# Altium PCB KORICHE_N3.PCBDOC
Units mm, origin at the board's own origin, x right, y up, seen from the top; angles counter-clockwise.
Board outline 84.07 x 63.12 mm, 2 copper layers (TopLayer, BottomLayer); 37 components, 35 nets, 148 pads, 21 vias.
Unrouted connection lines stored in the file: 2.
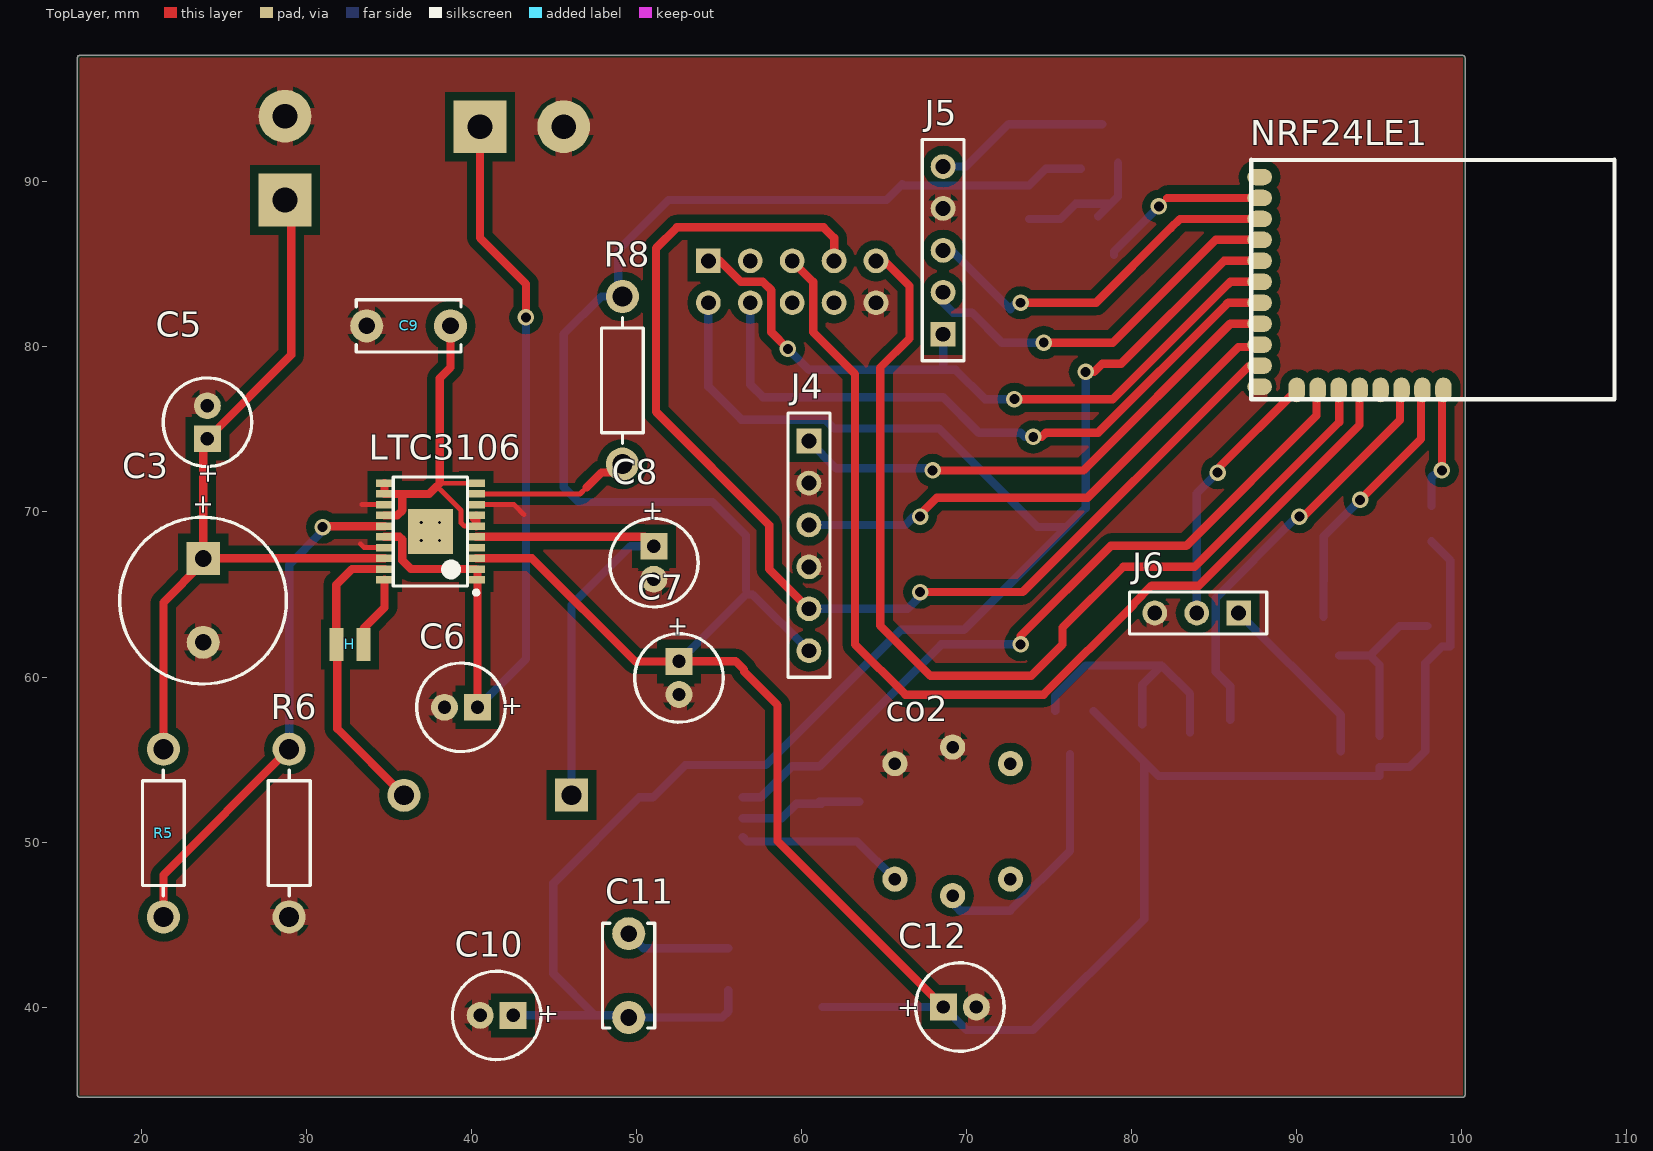
[diagram p0: TopLayer view]
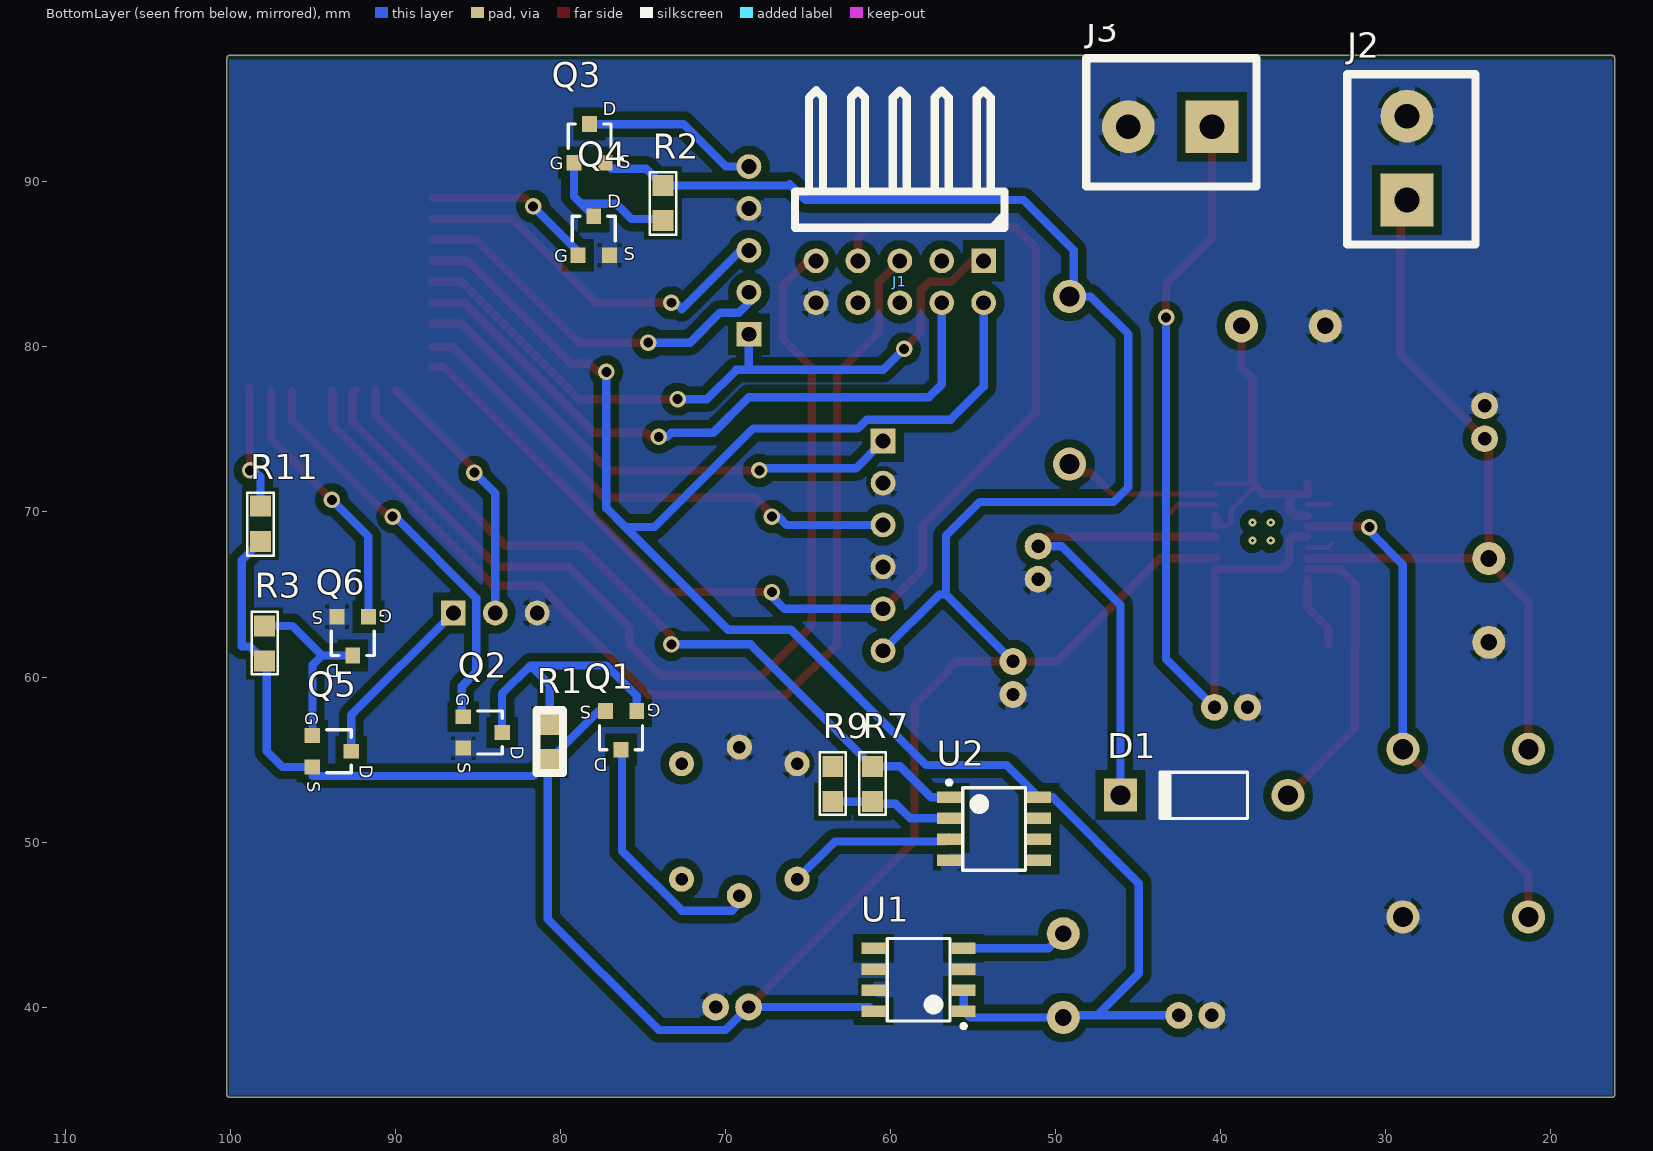
[diagram p1: BottomLayer view, seen from below]
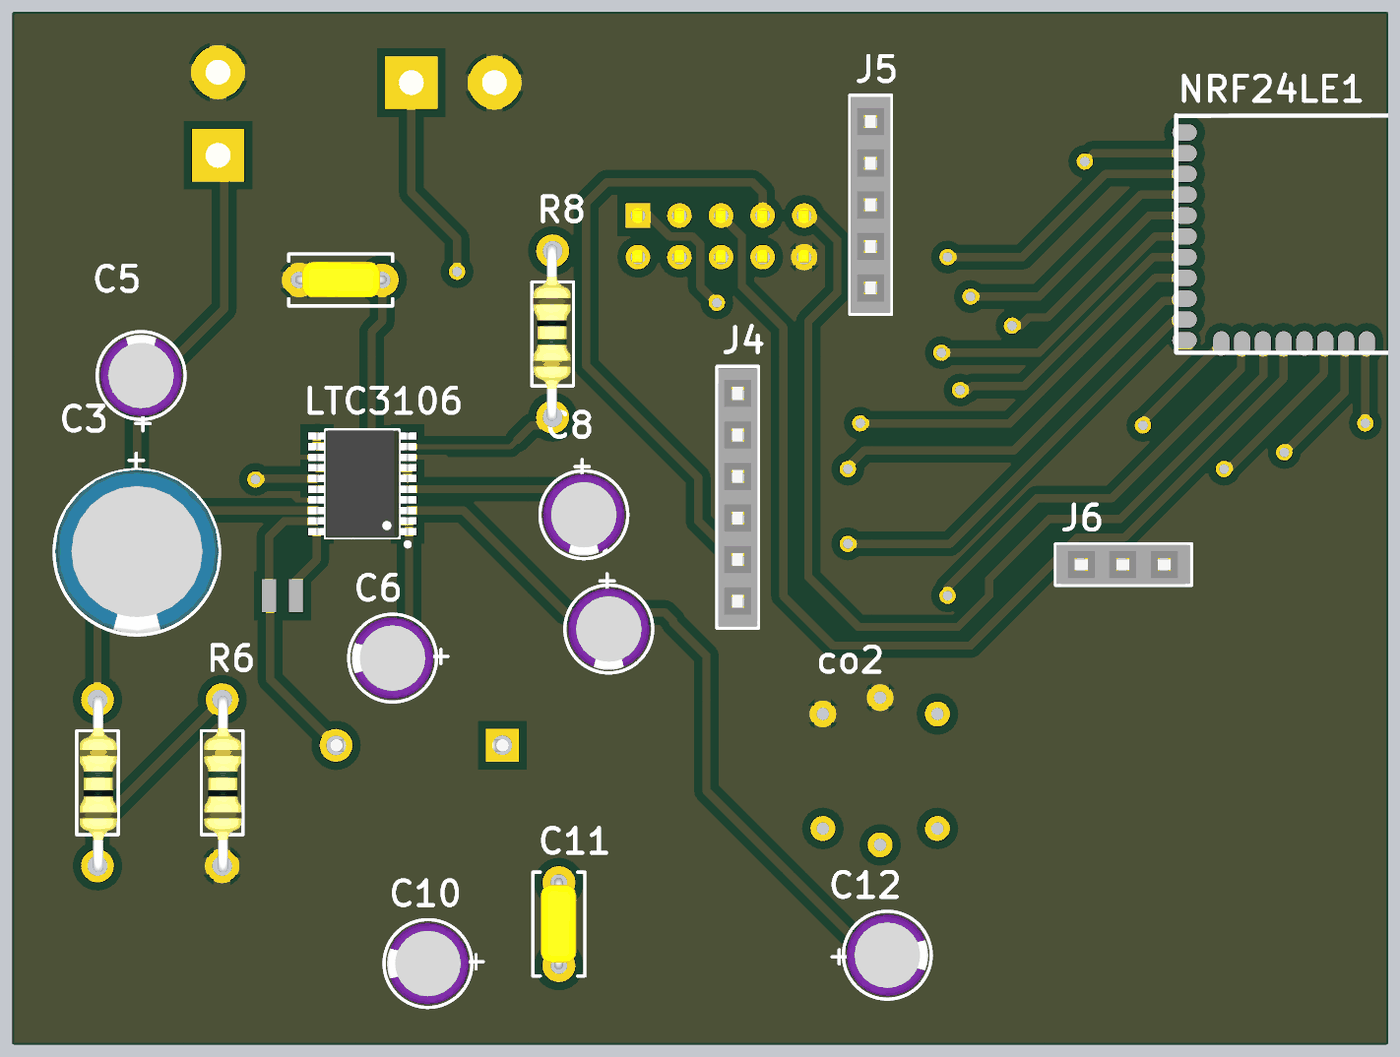
[diagram p2: 3D render of the assembled board from above, using the file's embedded part models]
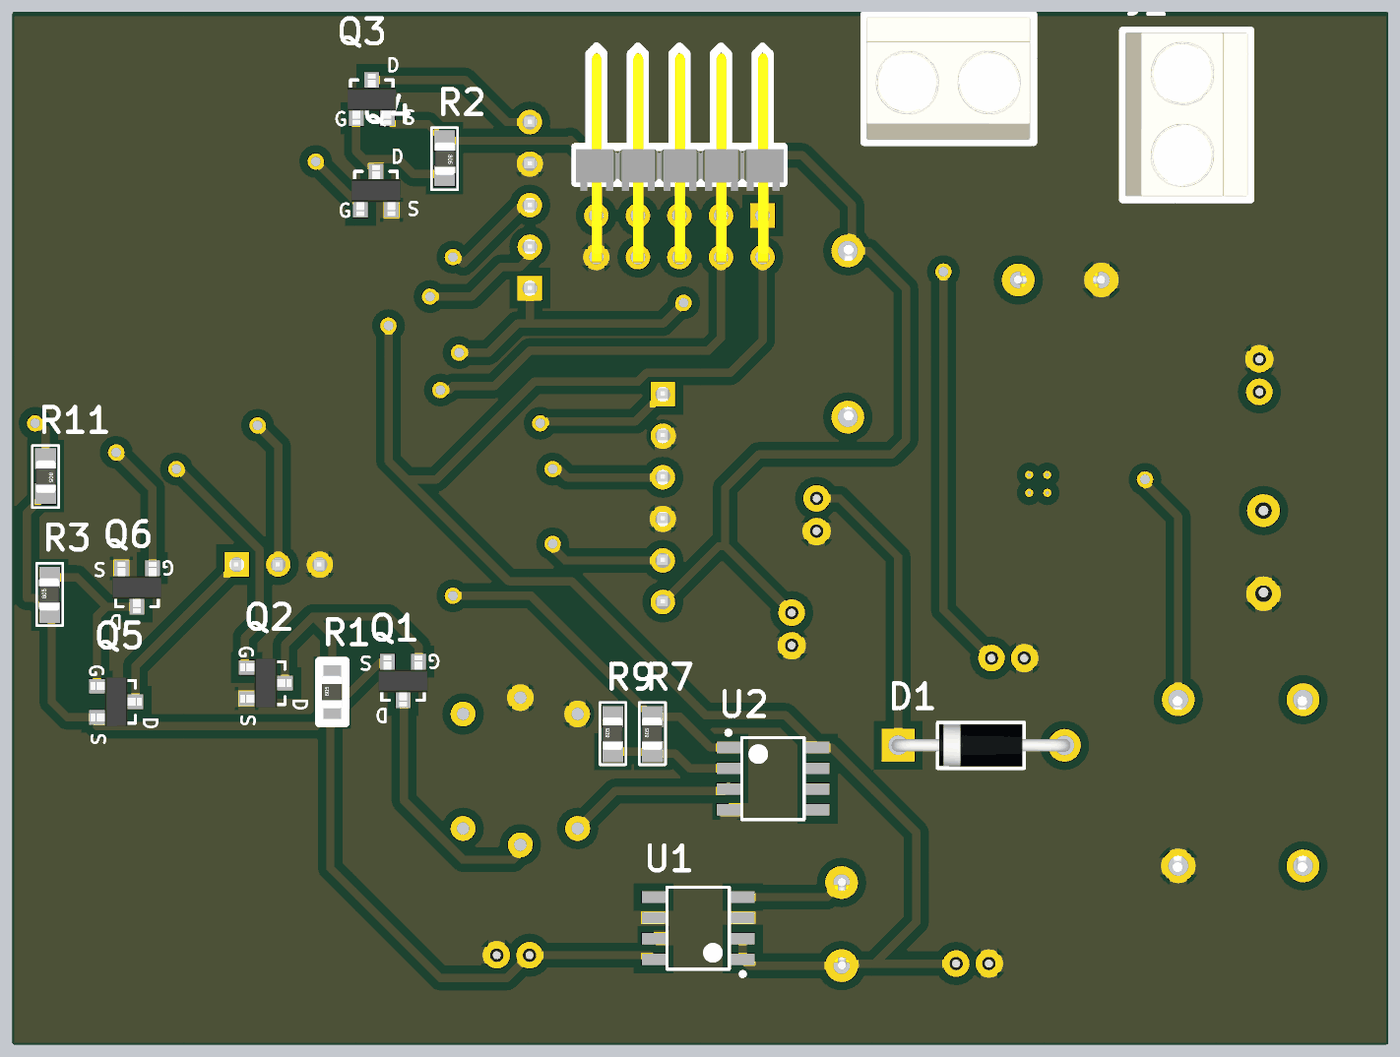
[diagram p3: 3D render of the assembled board from below, using the file's embedded part models]

## Layer stack, top to bottom
TopSolder: solder mask 0.0102, Solder Resist, Dk 3.5
TopLayer: signal copper 0.0356
Dielectric1: core 0.32, FR-4, Dk 4.8
BottomLayer: signal copper 0.0356
BottomSolder: solder mask 0.0102, Solder Resist, Dk 3.5

## Board outline
16.256,34.544 cw(c16.256,34.671) 16.129,34.671 16.129,97.536 cw(c16.256,97.536) 16.256,97.663 100.076,97.663 cw(c100.076,97.536) 100.203,97.536 100.203,34.671 cw(c100.076,34.671) 100.076,34.544

## Design rules (kind name [scope] priority, off if disabled: settings)
Clearance Clearance_17 [InNamedPolygon('GND_L02_P022')] p1: gap=0.5
Clearance Clearance_16 [InNamedPolygon('GND_L01_P020')] p2: gap=0.5
Clearance Clearance_15 [InNamedPolygon('GND_L01_P020')] p3: gap=0.5
Clearance Clearance_14 [InNamedPolygon('GND_L02_P022')] p4: gap=0.5
Clearance Clearance_13 [InNamedPolygon('GND_L02_P022')] p5: gap=0.254
Clearance Clearance_12 [InNamedPolygon('top-No Net')] p6: gap=0.5
Clearance Clearance_11 [InNamedPolygon('BottomLayer-No Net')] p7: gap=0.5
Clearance Clearance_10 [InNamedPolygon('BottomLayer-No Net')] p8: gap=0.5
Clearance Clearance_9 [InNamedPolygon('BottomLayer-No Net')] p9: gap=0.5
Clearance Clearance_8 [InNamedPolygon('BottomLayer-No Net')] p10: gap=0.5
Clearance Clearance_7 [InNamedPolygon('GND_L02_P036')] p11: gap=0.254
Clearance Clearance_6 [InNamedPolygon('NONET_L01_P004')] p12: gap=0.5
Clearance Clearance_5 [InNamedPolygon('NONET_L01_P004')] p13: gap=0.5
Clearance Clearance_4 [InNamedPolygon('NONET_L01_P004')] p14: gap=0.5
Clearance Clearance_3 [InNamedPolygon('NONET_L01_P004')] p15: gap=0.5
Clearance Clearance_2 [InNamedPolygon('NONET_L01_P004')] p16: gap=0.5
Clearance Clearance_1 [InNamedPolygon('NONET_L02_P005') Or  InNamedPolygon('NONET_L01_P004')] p17: gap=0.5
Clearance PowerPlaneClearance [InNamedPolygon('NONET_L02_P005') Or  InNamedPolygon('NONET_L01_P004')] p18 off: gap=1.016
Clearance [All] p19: gap=0.3
FabricationTestPointUsage TestPointUsage [All] p1: valid=0 allowmultiple=FALSE
FabricationTestpoint Testpoint [All] p1: side=3 testpointundercomponent=TRUE minsize=1.016 maxsize=2.54 preferedsize=1.524 minholesize=0.508 maxholesize=1.016 preferedholesize=0.813 testpointgrid=0.025 allowsidetop=TRUE allowsidebottom=TRUE usegrid=TRUE gridtolerance=0
Height [All] p1: minheight=0 maxheight=50.8 prefheight=12.7
HoleSize [All] p1: absolutevalues=TRUE maxlimit=7.62 minlimit=0.025 maxpercent=80.000 minpercent=20.000
PlaneClearance [All] p1: clearance=1.016
PlaneConnect [All] p1: planeconnectstyle=Relief reliefexpansion=0.5 reliefentries=4 reliefconductorwidth=1.016 reliefairgap=0.5
PolygonConnect [All] p1: connectstyle=Relief reliefconductorwidth=1.016 reliefentries=4 polygonreliefangle="90 Angle" airgapwidth=0.254
RoutingVias [All] p1: holewidth=0.6 width=1.524 viastyle="Through Hole" minholewidth=0.6 minwidth=1.524 maxholewidth=0.6 maxwidth=1.524
SilkToSolderMaskClearance SilkscreenOverComponentPads [IsPad] p1: minsilkscreentomaskgap=0.254 clearancetoexposedcopper=TRUE
SolderMaskExpansion [All] p1: expansion=0.05
Width [All] p1: maxlimit=3 minlimit=0.3 preferedwidth=0.5 minimp=50.000000 maximp=50.000000 favimp=50.000000
22 further rules are at their usual default settings.

## Components (designator, comment, footprint, x,y, rotation, side; value= is the part's Value field where it differs from the comment)
C3 "CONDENSATEUR_POL_ELECTROLY_RAD_5.08/10.16" CONDENSATEUR_POLARISE_ELECTROLYTIQUE_RADIAL_5.08/10.16 23.749,67.183 r270 top
C5 "CONDENSATEUR_POL_ELECTROLY_RAD_2.0/5.08" CONDENSATEUR_POLARISE_ELECTROLYTIQUE_RADIAL_2.0/5.08 24.003,75.438 r90 top
C6 "CONDENSATEUR_POL_ELECTROLY_RAD_2.0/5.08" CONDENSATEUR_POLARISE_ELECTROLYTIQUE_RADIAL_2.0/5.08 39.37,58.166 r180 top
C7 "CONDENSATEUR_POL_ELECTROLY_RAD_2.0/5.08" CONDENSATEUR_POLARISE_ELECTROLYTIQUE_RADIAL_2.0/5.08 52.578,59.944 r270 top
C8 "CONDENSATEUR_POL_ELECTROLY_RAD_2.0/5.08" CONDENSATEUR_POLARISE_ELECTROLYTIQUE_RADIAL_2.0/5.08 51.054,66.929 r270 top
C9 "CONDENSATEUR_CER_RAD_5.08" CONDENSATEUR_CERAMIQUE_RADIAL_5.08 38.735,81.28 r180 top
C10 "CONDENSATEUR_POL_ELECTROLY_RAD_2.0/5.08" CONDENSATEUR_POLARISE_ELECTROLYTIQUE_RADIAL_2.0/5.08 41.529,39.497 r180 top
C11 "CONDENSATEUR_CER_RAD_5.08" CONDENSATEUR_CERAMIQUE_RADIAL_5.08 49.53,44.45 r270 top
C12 "CONDENSATEUR_POL_ELECTROLY_RAD_2.0/5.08" CONDENSATEUR_POLARISE_ELECTROLYTIQUE_RADIAL_2.0/5.08 69.596,40.005 r0 top
co2 "-6pins" PCBComponent_1 65.659,47.752 r90 top
D1 "DIODE_SCHOTTKY_DO41 : 1N5817" DIODE_DO41 41.021,52.832 r0 bottom
H "Bobine_22nH" SELF 32.639,61.976 r180 top
J1 "BARRETTE_5 CONTACTS_2 RANGEES_MALE_COUDEE" BARRETTE_5X2_M_C 54.356,85.217 r0 bottom
J2 "BORNIER2 DROIT A VIS" BORNIER2_A_VIS 28.702,88.9 r90 bottom
J3 "BORNIER2 DROIT A VIS" BORNIER2_A_VIS 40.513,93.345 r0 bottom
J4 "BARRETTE_6 CONTACTS_1 RANGEE_FEMELLE_DROITE" BARRETTE_6_F_D 60.452,74.295 r270 top
J5 "BARRETTE_5 CONTACTS_1 RANGEE_FEMELLE_DROITE" BARRETTE_5_F_D 68.58,80.772 r90 top
J6 "BARRETTE 3 CONTACTS 1 RANGEE FEMELLE DROITE" BARRETTE_3_F_D 86.487,63.881 r180 top
LTC3106 "LTC3106_Regulateur" ltc3106 26.416,80.518 r180 top
NRF24LE1 "NRF24LE1_32Pin" "NRF24LE1 SMD" 87.757,77.597 r90 top
Q1 "TRANSISTOR_MOSFET-P_SOT23_GSD" TRANSISTOR_MOSFET-P_SOT23_GSD 76.327,56.769 r0 bottom
Q2 "TRANSISTOR_MOSFET-N_SOT23_GSD" TRANSISTOR_MOSFET-N_SOT23_GSD 84.709,56.642 r270 bottom
Q3 "TRANSISTOR_MOSFET-P_SOT23_GSD" TRANSISTOR_MOSFET-P_SOT23_GSD 78.232,92.329 r180 bottom
Q4 "TRANSISTOR_MOSFET-N_SOT23_GSD" TRANSISTOR_MOSFET-N_SOT23_GSD 77.978,86.741 r180 bottom
Q5 "TRANSISTOR_MOSFET-P_SOT23_GSD" TRANSISTOR_MOSFET-P_SOT23_GSD 93.853,55.499 r270 bottom
Q6 "TRANSISTOR_MOSFET-N_SOT23_GSD" TRANSISTOR_MOSFET-N_SOT23_GSD 92.583,62.484 r0 bottom
R1 "RESISTANCE_CMS_0805" RESISTANCE_CMS_0805 80.645,54.991 r90 bottom
R2 "RESISTANCE_CMS_0805" RESISTANCE_CMS_0805 73.787,89.789 r270 bottom
R3 "RESISTANCE_CMS_0805" RESISTANCE_CMS_0805 97.917,60.96 r90 bottom
R5 "RESISTANCE_AXIALE_1/4W" RESISTANCE_1/4W 21.336,45.466 r90 top
R6 "RESISTANCE_AXIALE_1/4W" RESISTANCE_1/4W 28.956,45.466 r90 top
R7 "RESISTANCE_CMS_0805" RESISTANCE_CMS_0805 61.087,52.451 r90 bottom
R8 "RESISTANCE_AXIALE_1/4W" RESISTANCE_1/4W 49.149,83.058 r270 top
R9 "RESISTANCE_CMS_0805" RESISTANCE_CMS_0805 63.5,52.451 r90 bottom
R11 "RESISTANCE_CMS_0805" RESISTANCE_CMS_0805 98.171,70.358 r270 bottom
U1 "LT1763_S8" LT1763-8N 58.293,41.656 r0 bottom
U2 "LM158_SOIC8" LT1763-8N 53.721,50.8 r180 bottom

## Footprints (in the part's own frame and the unit in brackets; to place one, negate y for a bottom-side part, rotate by r counter-clockwise, add the part's x,y. Pads: shape width x height; smd on the part's side, far side on the other; paste and mask are expansions set on the pad)
BARRETTE_3_F_D [mm] "BARRETTE 3 CONTACTS ; 1 RANGEE ; DROITE ; FEMELLE ; ESPACEMENT BROCHES = 2.54 mm"
  rect 1.5x1.5 hole 0.9: 1(0,0)
  round 1.5 hole 0.9: 2(2.54,0) 3(5.08,0)
  silkscreen extent -1.7,-1.27 6.61,1.27, body extent -1.56,-1.21 6.56,1.2, height 8.5
BARRETTE_5_F_D [mm] "BARRETTE 5 CONTACTS ; 1 RANGEE ; DROITE ; FEMELLE ; ESPACEMENT BROCHES = 2.54 mm"
  rect 1.5x1.5 hole 0.9: 1(0,0)
  round 1.5 hole 0.9: 2(2.54,0) 3(5.08,0) 4(7.62,0) 5(10.16,0)
  silkscreen extent -1.6,-1.27 11.8,1.27, body extent -1.5,-1.2 11.7,1.21, height 8.5
BARRETTE_5X2_M_C [mm] "BARRETTE 5 CONTACTS ; 2 RANGEES ; COUDEE ; MALE ; ESPACEMENT BROCHES = 2.54 mm"
  rect 1.5x1.5 hole 0.9: 1(0,0)
  round 1.5 hole 0.9: 2(0,2.54) 3(2.54,0) 4(2.54,2.54) 5(5.08,0) 6(5.08,2.54) 7(7.62,0) 8(7.62,2.54) 9(10.16,0) 10(10.16,2.54)
  silkscreen extent -1.27,-10.34 11.43,-2, body extent -1.3,-9.9 11.4,2.86, height 5.64
BARRETTE_6_F_D [mm] "BARRETTE 6 CONTACTS ; 1 RANGEE ; DROITE ; FEMELLE ; ESPACEMENT BROCHES = 2.54 mm"
  rect 1.5x1.5 hole 0.9: 1(0,0)
  round 1.5 hole 0.9: 2(2.54,0) 3(5.08,0) 4(7.62,0) 5(10.16,0) 6(12.7,0)
  silkscreen extent -1.7,-1.27 14.3,1.27, body extent -1.57,-1.2 14.17,1.21, height 8.5
BORNIER2_A_VIS [mm] "BORNIER 2 PLOTS A VIS ; VERTICAL ; ESPACEMENT BROCHES = 5.08mm"
  rect 3.2x3.2 hole 1.5: 1(0,0)
  round 3.2 hole 1.5: 2(5.08,0)
  silkscreen extent -2.69,-4.15 7.62,3.63, body extent -2.5,-4 7.5,3.5, height 10
CONDENSATEUR_CERAMIQUE_RADIAL_5.08 [mil] "CONDENSATEUR TRAVERSANT CERAMIQUE RADIAL ; DIMENSIONS : 3.17mm x 5.08mm"
  round 79 hole 40: 1(0,0) 2(200,0)
  silkscreen extent -25,-62 225,63, body extent -11,-43 209,42, height 148
CONDENSATEUR_POLARISE_ELECTROLYTIQUE_RADIAL_2.0/5.08 [mil] "CONDENSATEUR POLARISE ELECTROLYTIQUE RADIAL ; DIAMETRE : 5.08mm ; ESPACEMENT BROCHES : 2mm"
  rect 64x64 / inner round 64 / far side round 64 hole 32: 1(-39.37,0)
  round 64 hole 32: 2(39.37,0)
  silkscreen extent -106,-106 106,105, body extent -98,-98 98,98, height 433
CONDENSATEUR_POLARISE_ELECTROLYTIQUE_RADIAL_5.08/10.16 [mil] "CONDENSATEUR POLARISE ELECTROLYTIQUE RADIAL ; DIAMETRE : 10.16mm ; ESPACEMENT BROCHES : 5.08mm"
  rect 79x79 / inner round 79 / far side round 79 hole 40: 1(0,0)
  round 79 hole 40: 2(200,0)
  silkscreen extent -98,-199 299,198, body extent -98,-197 295,197, height 630
DIODE_DO41 [mm] "DIODE DO41 ; DIMENSIONS : 5.2mm x 2.7mm ; PERCAGE : 0.8mm"
  round 2 hole 1.2: 1(-5.11,0)
  rect 2x2 hole 1.2: 2(5.05,-0.01)
  silkscreen extent -2.65,-1.4 2.75,1.4, body extent -5.47,-1.29 5.45,1.28, height 2.55
LT1763-8N [mm] "SOIC, 8-Leads, Body 4,90x3,91mm, Pitch 1,27mm, IPC Medium Density"
  rect 1.45x0.7 smd: 1(-2.725,1.905) 2(-2.725,0.635) 3(-2.725,-0.635) 4(-2.725,-1.905) 5(2.725,-1.905) 6(2.725,-0.635) 7(2.725,0.635) 8(2.725,1.905)
  silkscreen extent -2.85,-2.5 1.9,2.93, body extent -2,-2.5 2,2.5, height 1.76
ltc3106 [mm] "TSOP, 20-Leads, Body 6,60x4,50mm, Pitch 0,65mm, Thermal Pad 2,74x2,74mm, IPC Medium Density"
  rect 1.05x0.45 smd: 1(-13.875,14.625) 2(-13.875,13.975) 3(-13.875,13.325) 4(-13.875,12.675) 5(-13.875,12.025) 6(-13.875,11.375) 7(-13.875,10.725) 8(-13.875,10.075) 9(-13.875,9.425) 10(-13.875,8.775) 11(-8.325,8.775) 12(-8.325,9.425) 13(-8.325,10.075) 14(-8.325,10.725) 15(-8.325,11.375) 16(-8.325,12.025) 17(-8.325,12.675) 18(-8.325,13.325) 19(-8.325,13.975) 20(-8.325,14.625)
  rect 2.74x2.74 smd: 21(-11.1,11.7)
  silkscreen extent -14,8.4 -8.85,15.52, body extent -14.4,8.4 -7.8,15, height 1.2
"NRF24LE1 SMD" [mm]
  oval 1.5x1 smd: 1(-0.2,-11.14) 2(-0.2,-9.87) 3(-0.2,-8.6) 4(-0.2,-7.33) 5(-0.2,-6.06) 6(-0.2,-4.79) 7(-0.2,-3.52) 8(-0.2,-2.25)
  oval 1x1.5 smd: 9(0,0) 10(1.27,0) 11(2.54,0) 12(3.81,0) 13(5.08,0) 14(6.35,0) 15(7.62,0) 16(8.89,0) 17(10.16,0) 18(11.43,0) 19(12.7,0)
  silkscreen extent -0.76,-21.51 13.75,0.51
PCBComponent_1 [mil]
  round 60 hole 30: 1(-39.37,-137.8) 2(0,0) 3(314.96,-137.8) 4(275.59,0) 5(275.59,-275.59) 6(0,-275.59)
RESISTANCE_1/4W [mil] "RESISTANCE 0.25W; DIAMETRE : 2.54mm ; LONGUEUR : 6.35mm ; PAS : 10.16mm"
  round 79 hole 48: 1(0,0) 2(400,0)
  silkscreen extent 50,-50 350,50, body extent -15,-47 409,44, height 116
RESISTANCE_CMS_0805 [mil] "RESISTANCE CMS 0805 ; DIMENSIONS : 2mm x 1.25mm"
  rect 50x50 smd: 1(0,0) 2(84,0)
  silkscreen extent -31,-31 118,31, body extent 4,-24 83,26, height 31
SELF [mm] "Precision Wire Wound Inductor, 2-Leads, Body 2,50x2,00mm, IPC Medium Density"
  rect 0.85x2 smd: 1(-0.825,0) 2(0.825,0)
  body extent -1.25,-1 1.25,1, height 1.2
TRANSISTOR_MOSFET-N_SOT23_GSD [mm] "SOT23 ; DIMENSIONS : 3.0mm x 2.5 mm"
  rect 0.9x0.95 smd: 1(-0.95,-1.175) 2(0.95,-1.175) 3(0,1.175)
  silkscreen extent -1.3,-0.3 1.3,1.18, body extent -1.5,-1.57 1.5,1.57, height 1.1
TRANSISTOR_MOSFET-P_SOT23_GSD [mm] "SOT23 ; DIMENSIONS : 3.0mm x 2.5 mm"
  rect 0.9x0.95 smd: 1(-0.95,-1.175) 2(0.95,-1.175) 3(0,1.175)
  silkscreen extent -1.3,-0.3 1.3,1.18, body extent -1.5,-1.57 1.5,1.57, height 1.1

## Part data
C3: "CONDENSATEUR POLARISE ELECTROLYTIQUE RADIAL 5.08/10.16"
C5 C6 C7 C8 C10 C12: "CONDENSATEUR POLARISE ELECTROLYTIQUE RADIAL 2.0/5.08"
C9 C11: "CONDENSATEUR TRAVERSANT CERAMIQUE RADIAL 5.08mm"
co2: library part capteur_co2, "capteur_co2"
D1: "DIODE SCHOTTKY DO41 : 1N5817"
J1: "BARRETTE 5 CONTACTS 2 RANGEES MALE COUDEE"
J2 J3: library part "BORNIER2_DROIT_A VIS", "BORNIER 2 PLOTS DROIT A VIS 5.08mm"
J4: "BARRETTE 6 CONTACTS 1 RANGEE FEMELLE DROITE"
J5: "BARRETTE 5 CONTACTS 1 RANGEE FEMELLE DROITE"
J6: library part "BARRETTE_3 CONTACTS_1 RANGEE_FEMELLE_DROITE"
LTC3106: library part "LTC31068FE PACKAGE", "LTC3106_Regulateur_MPC"
Q1 Q3 Q5: "TRANSISTOR MOSFET CANAL P BOITIER SOT23_GSD"
Q2 Q4 Q6: "TRANSISTOR MOSFET CANAL N BOITIER SOT23_GSD"
R1 R2 R3 R7 R9 R11: "RESISTANCE CMS 0805"
R5 R6 R8: "RESISTANCE TRAVERSANTE AXIALE 1/4W"
U1: library part LT1763_S8_LDO_3V3_S8, "LDO 3V3 S8"
U2: library part LM_AOP_SOIC, "AOP_LM158 - SOIC8"

## Via types
v1: diameter 1, hole 0.6, TopLayer to BottomLayer, 17 vias
v2: diameter 0.5, hole 0.2, TopLayer to BottomLayer, 4 vias

## Nets (pads, with @x,y where several pads share a name; then routed paths per layer and width w, separated by ;. In a path a pad name is that pad's centre, name@x,y a point inside that pad or via, vN(x,y) a via of type N, cw(c..) or ccw(c..) an arc to the next point about the centre after c; other vN are vias at no path point)
1: C6.1 J3.1 LTC3106.1 LTC3106.2 LTC3106.16 | length 53
  TopLayer w0.5: LTC3106.16 35.647,68.493 35.814,68.326 35.814,67.056 36.327,66.543 LTC3106.2 LTC3106.2@40.291,66.464 ; C6.1 LTC3106.2@40.37,66.464 ; J3.1 40.513,86.614 43.307,83.82 v1(43.307,81.788)
  BottomLayer w0.5: C6.1 43.307,61.103 v1(43.307,81.788)
3V3: C10.1 C11.2 J1.2 NRF24LE1.15 U1.1 U1.2 U2.8 | length 117.1
  TopLayer w0.508: v1(77.216,78.486) 77.724,78.486 78.232,78.994 79.375,78.994 85.598,85.217 NRF24LE1.15
  BottomLayer w0.508: C10.1 47.498,39.497 ; C11.2@49.403,39.37 C11.2 55.187,39.37 U1.1 U1.2 ; C11.2@49.403,39.497 47.498,39.497 ; J1.2 54.356,77.597 56.354,75.599 61.431,75.599 61.973,75.057 68.326,75.057 74.295,69.088 76.073,69.088 ; v1(77.216,78.486) 77.216,70.231 76.073,69.088 ; 47.498,39.497 44.958,42.037 44.958,47.498 50.165,52.705 U2.8 52.959,54.668 57.843,54.668 66.04,62.865 69.85,62.865 76.073,69.088
CMD_CO2: NRF24LE1.3 Q2.1 | length 24.7
  TopLayer w0.508: v1(90.17,69.723) 90.424,69.723 96.266,75.565 NRF24LE1.3@96.266,77.306
  BottomLayer w0.508: Q2.1@85.979,57.404 85.979,59.436 85.09,60.325 85.09,64.77 v1@89.852,69.532
CMD_MICS2684: NRF24LE1.2 Q6.1 | length 16.1
  TopLayer w0.508: v1(93.853,70.739) 97.536,74.422 NRF24LE1.2@97.536,77.306
  BottomLayer w0.5: Q6.1 91.633,65.818
  BottomLayer w0.508: 91.633,65.818 91.633,68.519 v1(93.853,70.739)
CMD_MICS6484: NRF24LE1.18 Q4.1 | length 10.4
  TopLayer w0.3: v1(81.661,88.519) 82.169,89.027
  TopLayer w0.5: 82.169,89.027 NRF24LE1.18
  BottomLayer w0.5: Q4.1 78.928,85.786 v1(81.661,88.519)
CO: J1.1 J5.1 NRF24LE1.14 | length 43.3
  TopLayer w0.508: J1.1 55.052,85.217 56.322,83.947 57.658,83.947 58.166,83.439 58.166,80.899 v1(59.182,79.883) ; v1(72.898,76.835) 78.867,76.835 85.629,83.597 85.979,83.947 NRF24LE1.14
  BottomLayer w0.508: v1(59.182,79.883) 60.452,78.613 69.342,78.613 71.12,76.835 v1(72.898,76.835) ; 68.58,78.74 J5.1
CO2: co2.2 U2.3 | length 10.3
  BottomLayer w0.508: U2.3@56.446,50.292 56.7,50.038 63.373,50.038 co2.2
CO2_O: NRF24LE1.7 R7.2 U2.1 | length 46.2
  TopLayer w0.508: v1(73.279,61.976) 73.279,62.484 78.74,67.945 83.312,67.945 91.207,75.84 NRF24LE1.7@91.207,77.397
  BottomLayer w0.508: U2.1 57.531,52.705 59.411,54.585 R7.2 68.478,61.976 v1(73.279,61.976)
CO2_VCC: co2.1 Q1.3 | length 15.3
  BottomLayer w0.508: co2.1@68.691,46.752 69.596,45.847 72.644,45.847 76.266,49.469 Q1.3@76.266,55.34
FCSN: J1.5 NRF24LE1.5 | length 65.6
  TopLayer w0.5: J1.5 60.706,83.947 60.706,80.899 63.246,78.359 63.246,61.976 66.294,58.928 74.676,58.928 80.107,64.359 80.107,64.419 81.22,65.532 84.074,65.532 93.817,75.275 NRF24LE1.5
FMISO: J1.9 NRF24LE1.6 | length 62
  TopLayer w0.5: J1.9 65.024,85.217 66.548,83.693 66.548,80.518 64.77,78.74 64.77,63.119 67.818,60.071 73.914,60.071 75.819,61.976 75.819,62.998 79.496,66.675 83.82,66.675 92.583,75.438 92.583,77.221 NRF24LE1.6@92.407,77.397
GND: C3.2 C5.2 C6.2 C7.2 C8.2 C9.2 C10.2 C12.2 co2.3 co2.4 J1.10 J2.2 J3.2 J4.2 J4.4 J5.4 J6.3 LTC3106.8 LTC3106.13 LTC3106.17 NRF24LE1.9 Q2.2 Q4.2 Q6.2 R6.1 R9.2 U1.3 U1.6 U1.7 U2.4 | length 6.1
  TopLayer w0.3: 33.274,68.072 33.503,67.843 LTC3106.17 ; 33.359,70.443 LTC3106.13 ; LTC3106.8 42.587,70.443 43.18,69.85
LED: J4.3 NRF24LE1.11 | length 31.8
  TopLayer w0.508: v1(67.183,69.723) 67.183,69.85 68.199,70.866 77.343,70.866 86.474,79.997 NRF24LE1.11@87.757,79.997
  BottomLayer w0.508: J4.3 66.294,69.215 66.802,69.723 v1(67.183,69.723)
MICS2684: J6.1 Q5.3 | length 10.9
  BottomLayer w0.508: J6.1 92.678,57.69 Q5.3
MICS6484: J5.5 Q3.3 | length 10.8
  BottomLayer w0.508: J5.5@68.453,90.932 J5.5 69.977,90.932 72.549,93.504 Q3.3
NetC8_1: C8.1 D1.2 LTC3106.5 | length 29
  TopLayer w0.5: LTC3106.5 50.49,68.493 C8.1
  BottomLayer w0.5: D1.2 46.071,64.359 49.641,67.929 C8.1
NetC11_1: C11.1 U1.4 | length 6.4
  BottomLayer w0.508: C11.1 50.419,43.561 U1.4
NetH_1: H.1 LTC3106.20 | length 4.4
  TopLayer w0.5: H.1 33.464,62.928 34.741,64.205 LTC3106.20
NetNRF24LE1_1: NRF24LE1.1 R11.1 | length 7.5
  TopLayer w0.5: v1(98.806,72.517) NRF24LE1.1@98.806,77.506
  BottomLayer w0.5: R11.1 98.171,72.136 v1(98.806,72.517)
NetQ1_1: Q1.1 Q2.3 R1.2 | length 17
  BottomLayer w0.5: Q1.1 75.377,58.867 77.216,60.706 81.82,60.706 ; R1.2 80.645,59.531 81.82,60.706 ; Q2.3 83.534,58.992 81.82,60.706
NetQ3_1: Q3.1 Q4.3 R2.2 | length 9.1
  BottomLayer w0.5: R2.2@73.787,87.757 75.692,87.757 76.606,88.671 78.733,88.671 ; Q4.3 78.733,88.671 ; Q3.1 79.182,89.12 78.733,88.671
NetQ5_1: Q5.1 Q6.3 R3.2 | length 11.2
  BottomLayer w0.5: Q6.3 94.456,61.309 ; Q5.1 95.028,60.737 94.456,61.309 ; R3.2 96.241,63.094 94.456,61.309
NetR7_1: R7.1 R9.1 U2.2 | length 7.5
  BottomLayer w0.508: U2.2 58.801,51.435 59.69,52.324 R7.1@61.214,52.324 ; R7.1 R9.1
NH3: J5.2 NRF24LE1.16 | length 22.9
  TopLayer w0.508: v1(74.676,80.264) 78.867,80.264 85.09,86.487 NRF24LE1.16
  BottomLayer w0.508: J5.2@68.453,82.804 69.181,82.076 70.324,82.076 72.136,80.264 v1(74.676,80.264)
NO2: J5.3 NRF24LE1.17 | length 23
  TopLayer w0.5: 82.371,87.197 82.931,87.757 NRF24LE1.17
  TopLayer w0.508: v1(73.279,82.677) 77.851,82.677 82.371,87.197
  BottomLayer w0.508: J5.3@68.453,85.852 69.088,85.852 72.644,82.296 73.025,82.677 v1(73.279,82.677)
O3: J6.2 NRF24LE1.8 | length 16
  TopLayer w0.508: v1(85.217,72.39) 85.217,72.607 NRF24LE1.8
  BottomLayer w0.508: J6.2 83.947,71.12 v1(85.217,72.39)
PGOOD: LTC3106.9 R8.2 | length 9.2
  TopLayer w0.3: LTC3106.9 46.582,71.093 46.99,71.501
  TopLayer w0.5: 46.99,71.501 47.879,72.39 R8.2@48.641,72.39
  BottomLayer w0.5: R8.2 R8.2@49.403,72.644
PROG: J1.4 NRF24LE1.13 | length 40.5
  TopLayer w0.508: v1(74.041,74.549) 74.549,74.549 74.803,74.803 77.978,74.803 85.572,82.397 ; 85.572,82.397 85.852,82.677 NRF24LE1.13
  BottomLayer w0.508: J1.4 56.896,77.724 57.658,76.962 68.58,76.962 70.739,74.803 73.279,74.803 73.533,74.549 v1(74.041,74.549)
RUN: LTC3106.15 R5.1 R6.2 | length 31.4
  TopLayer w0.5: R5.1 21.336,48.006 R6.2 ; v1(30.988,69.088) 31.043,69.143 LTC3106.15
  BottomLayer w0.5: R6.2 28.956,66.802 30.988,68.834 v1(30.988,69.088)
SHT: D1.1 H.2 LTC3106.19 | length 17.8
  TopLayer w0.5: LTC3106.19 32.761,66.543 31.814,65.596 H.2 31.877,61.913 31.877,56.866 D1.1
Solar_Cell: C3.1 C5.1 J2.1 LTC3106.18 R5.2 | length 47.8
  TopLayer w0.5: R5.2 21.336,64.516 C3.1@23.749,66.929 ; C3.1 23.749,74.184 C5.1 29.083,79.518 J2.1@29.083,89.535 ; C3.1@23.759,67.193 LTC3106.18
V_LED: J4.1 NRF24LE1.12 | length 31.7
  TopLayer w0.508: v1(67.945,72.517) 77.089,72.517 85.979,81.407 NRF24LE1.12
  BottomLayer w0.508: J4.1 62.103,72.644 67.818,72.644 v1(67.945,72.517)
VCC: C7.1 C12.1 J4.6 LTC3106.3 Q1.2 Q3.2 Q5.2 R1.1 R2.1 R3.1 R8.1 R11.2 U1.5 U1.8 | length 186.7
  TopLayer w0.5: LTC3106.3 43.678,67.193 49.927,60.944 C7.1 52.594,60.96 56.007,60.96 56.515,60.452 56.515,60.325 58.547,58.293 58.547,50.054 C12.1
  BottomLayer w0.5: C7.1 56.642,65.008 57.039,65.008 J4.6 ; 56.642,65.278 56.642,68.58 54.61,70.612 46.482,70.612 45.593,71.501 45.593,80.772 47.879,83.058 R8.1 48.895,83.312 48.895,85.852 51.943,88.9 65.151,88.9 66.103,89.852 ; U1.8@61.272,40.005 C12.1 69.993,38.608 74.041,38.608 80.772,45.339 80.772,54.864 81.629,54.007 95.028,54.007 Q5.2 96.84,54.549 97.79,55.499 97.79,60.833 R3.1 98.806,61.849 99.314,61.849 99.314,67.056 98.171,68.199 R11.2 ; 66.167,89.789 R2.1 74.803,90.805 Q3.2@76.933,90.805 ; Q1.2@77.692,57.944 R1.1
VCCR: C9.1 LTC3106.6 LTC3106.7 LTC3106.10 LTC3106.11 LTC3106.12 LTC3106.14 | length 22.8
  TopLayer w0.3: 38.1,71.374 39.37,70.104 39.37,69.342 39.569,69.143 LTC3106.6 ; 38.1,71.743 LTC3106.10 ; 40.05,69.551 LTC3106.7
  TopLayer w0.5: LTC3106.14 35.503,69.793 35.814,70.104 35.814,71.093 ; LTC3106.11 LTC3106.12 35.814,71.093 ; 37.91,71.564 37.438,71.093 35.814,71.093 ; 38.088,71.743 38.088,78.105 38.735,78.752 C9.1 ; LTC3106.6 LTC3106.7
VO: J1.7 J4.5 NRF24LE1.10 | length 72.2
  TopLayer w0.508: J4.5 58.039,66.548 58.039,69.215 51.181,76.073 51.181,85.979 52.451,87.249 61.341,87.249 61.976,86.614 J1.7 ; v1(67.183,65.151) 73.406,65.151 87.052,78.797 NRF24LE1.10@87.757,78.797
  BottomLayer w0.508: J4.5 66.421,64.135 67.183,64.897 v1(67.183,65.151)
pads on no net: co2.5 co2.6 J1.3 J1.6 J1.8 LTC3106.4 LTC3106.21 NRF24LE1.4 NRF24LE1.19 U2.5 U2.6 U2.7
copper on no net:
  other v2: 36.966,68.268 38.066,68.268 36.966,69.368 38.066,69.368

## Polygon pours and split planes (outlines as drawn)
GND on TopLayer "GND_L01_P020" (solid, remove dead copper, pour order 20): 16.129,97.79 16.383,97.536 100.076,97.536 100.076,34.671 16.256,34.671 16.256,97.536
GND on BottomLayer "GND_L02_P022" (solid, remove dead copper, pour order 22): 16.256,97.536 16.383,97.409 100.076,97.409 100.076,34.671 16.256,34.671 16.256,97.409 16.383,97.536

## Other copper
TopLayer:

## Silkscreen, mask and mechanical layers (free items; w line width, h text height)
Mechanical15:
  lines w0.254: 16.256,34.671 16.256,97.536 100.076,97.536 100.076,34.671 16.256,34.671

## Text inside footprints (layer, text, board x,y; h text height)
C3: TopOverlay "+" at 23.259,71.093 h1.14 r270
C5: TopOverlay "+" at 24.553,71.658 h1.14 r90
C6: TopOverlay "+" at 43.15,58.716 h1.14 r180
C7: TopOverlay "+" at 52.028,63.724 h1.14 r270
C8: TopOverlay "+" at 50.504,70.709 h1.14 r270
C10: TopOverlay "+" at 45.309,40.047 h1.14 r180
C12: TopOverlay "+" at 65.816,39.455 h1.14
Q1: BottomOverlay "D" at 77.127,55.069 h0.8 r180; BottomOverlay "S" at 78.127,58.269 h0.8 r180; BottomOverlay "G" at 73.927,58.369 h0.8 r180
Q2: BottomOverlay "G" at 86.309,59.042 h0.8 r90; BottomOverlay "S" at 86.209,54.842 h0.8 r90; BottomOverlay "D" at 83.009,55.842 h0.8 r90
Q3: BottomOverlay "G" at 80.632,90.729 h0.8; BottomOverlay "S" at 76.432,90.829 h0.8; BottomOverlay "D" at 77.432,94.029 h0.8
Q4: BottomOverlay "D" at 77.178,88.441 h0.8; BottomOverlay "S" at 76.178,85.241 h0.8; BottomOverlay "G" at 80.378,85.141 h0.8
Q5: BottomOverlay "D" at 92.153,54.699 h0.8 r90; BottomOverlay "S" at 95.353,53.699 h0.8 r90; BottomOverlay "G" at 95.453,57.899 h0.8 r90
Q6: BottomOverlay "G" at 90.183,64.084 h0.8 r180; BottomOverlay "S" at 94.383,63.984 h0.8 r180; BottomOverlay "D" at 93.383,60.784 h0.8 r180